# EAGLE board OneLedBlinker (EAGLE 7.6.0)
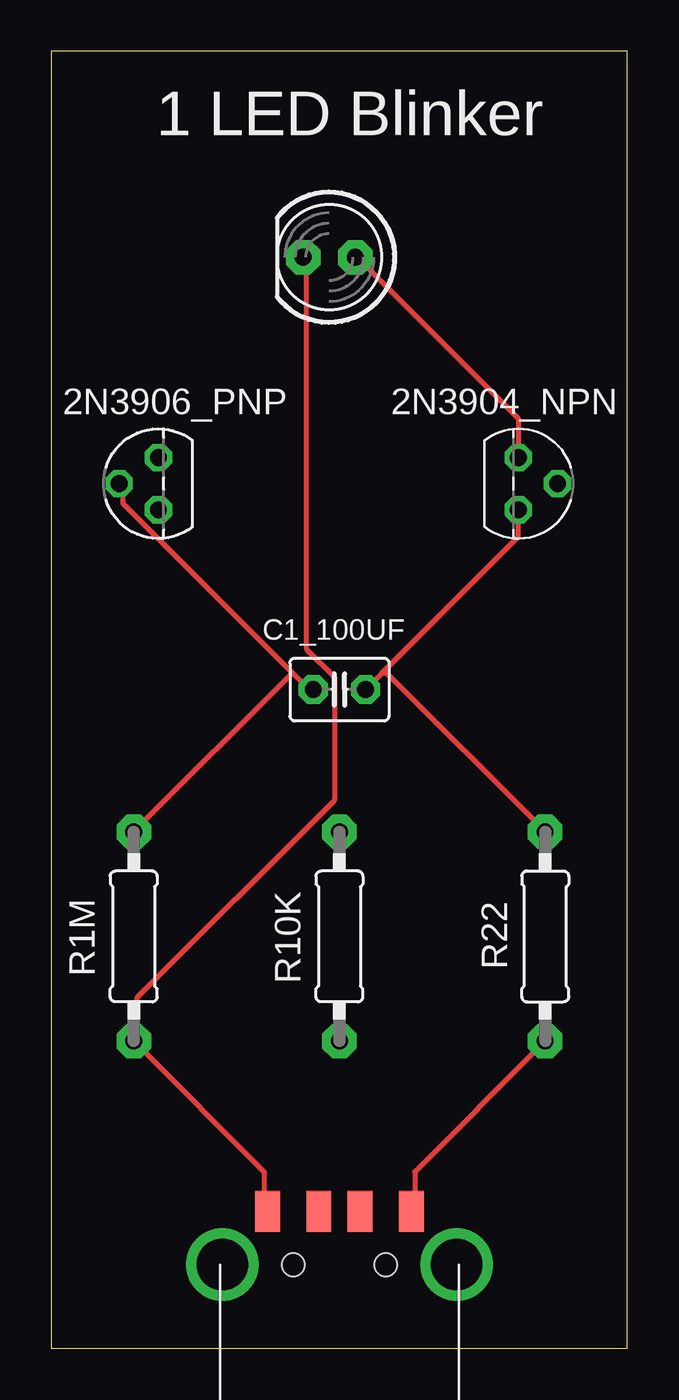
[diagram p0: board, top side]
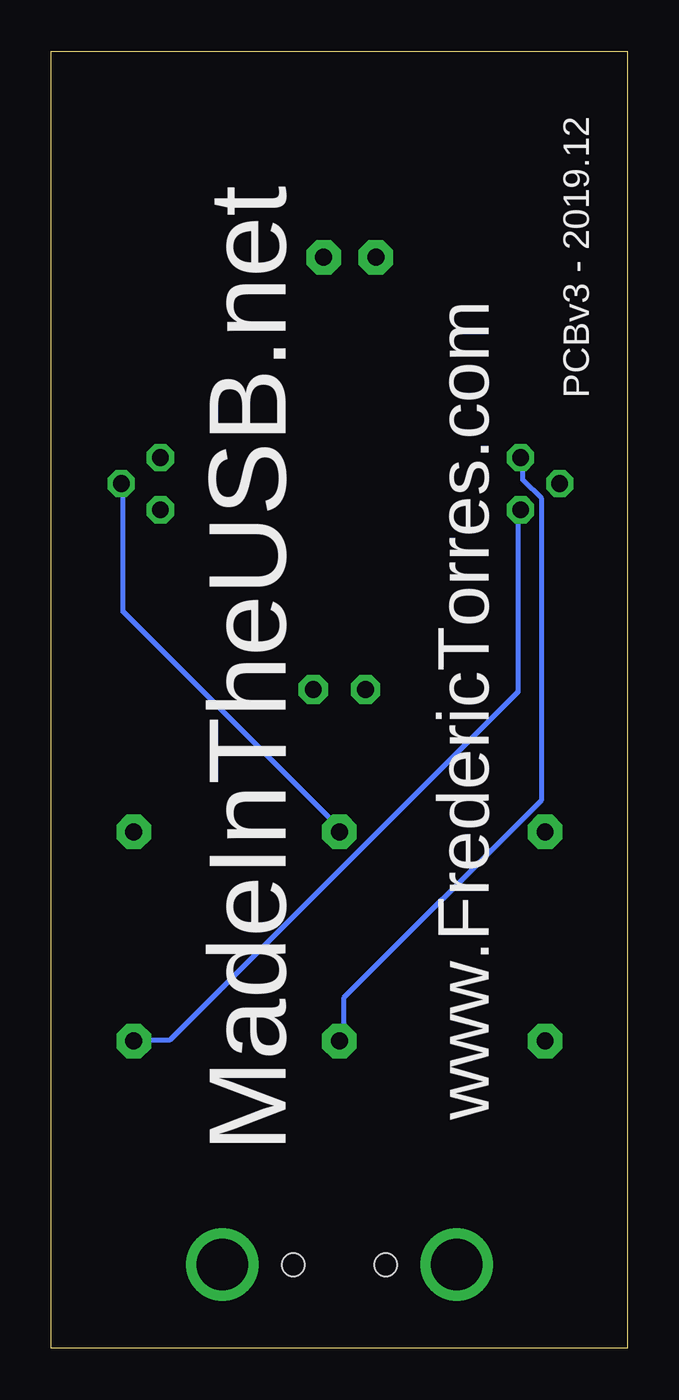
[diagram p1: board, bottom side, seen from below]

Size 28 x 63 mm. Coordinates in mm from the lower left corner, seen from the top.
Outline: 0,0 28,0 28,63 0,63 0,0
Copper layers (1*16): Top 0.035mm / dielectric 1.5mm / Bottom 0.035mm
Design rules "default": minimum track width 10mil, minimum drill 24mil, track to track 8mil, track to pad 8mil, pad to pad 8mil, via to via 8mil, smd to smd 8mil, copper to edge 40mil, drill to drill 8mil, minimum pad ring 10mil, minimum via ring 8mil, stop-mask expansion 4mil, vias tented up to drill 0mil, thermal gap 10mil

## Footprints (pad centres in the part's own frame; a part is rotated, then mirrored left to right if it is on the bottom)
TO92 = drill 0.813 octagon: 1 1.27,0; 2 0,1.905; 3 -1.27,0
C025-030X050 = drill 0.813 pad 1.422 octagon: 1 -1.27,0; 2 1.27,0
LED5MM = drill 0.813 pad 1.676 octagon: A -1.27,0; K 1.27,0
0207/10 = drill 0.813 pad 1.676 octagon: 1 -5.08,0; 2 5.08,0
MOLEX_480371000 = smd 1.2 x 2: 1 3.5,2.6; 2 1,2.6; 3 -1,2.6; 4 -3.5,2.6 | drill 2.5: M1 -5.7,0; M2 5.7,0 | hole 1.1: -2.25,0; 2.25,0

## Placement (x,y rotation side)
2N3904_NPN  2N3904  [TO92]  22.7,42 270 top
2N3906_PNP  2N3906  [TO92]  5.2,42 90 top
C1_100UF  [C025-030X050]  14,32 0 top
LED1  [LED5MM]  13.5,53 180 top
R1M  [0207/10]  4,20 90 top
R10K  [0207/10]  14,20 90 top
R22  [0207/10]  24,20 270 top
X1  USB-A  [MOLEX_480371000]  14,4.05 0 top

## Library data of the parts
2N3904_NPN = transistor
2N3906_PNP = transistor-pnp
C1_100UF LED1 R1M R10K R22 X1 = adafruit

## Nets
N$1: 2N3906_PNP.3 R22.2 X1.1
N$2: 2N3904_NPN.1 C1_100UF.2 R22.1
N$3: 2N3904_NPN.3 LED1.A
N$4: LED1.K R1M.1 X1.4
N$5: 2N3906_PNP.2 C1_100UF.1 R1M.2
N$6: 2N3906_PNP.1 R10K.1
N$7: 2N3904_NPN.2 R10K.2

## Tracks (layer width: path | path; a pad name or v marks a point on that pad's centre or on a via)
N$1
  Top 0.254: X1.1 17.66,6.75 17.66,8.57 23.83,14.75 R22.2
  Bottom 0.254: 2N3906_PNP.3 5.32,40.58 5.32,31.89 22.23,14.98 23.83,14.98 R22.2
N$2
  Top 0.254: 16.06,32.81 15.37,32.12 C1_100UF.2 | 16.06,32.81 22.69,39.44 22.69,40.58 2N3904_NPN.1 | 16.06,32.81 16.29,32.81 23.83,25.26 R22.1
N$3
  Top 0.254: 2N3904_NPN.3 22.69,43.32 22.69,45.15 14.92,52.92 LED1.A
N$4
  Top 0.254: X1.4 10.34,6.75 10.34,8.57 4.17,14.75 R1M.1 4.17,14.98 4.17,17.03 13.77,26.63 13.77,32.58 12.4,33.95 12.4,52.92 LED1.K
N$5
  Top 0.254: 11.72,32.81 12.63,31.89 C1_100UF.1 | 11.72,32.81 3.49,41.03 3.49,41.95 2N3906_PNP.2 | 11.72,32.81 4.17,25.26 R1M.2
N$6
  Bottom 0.254: 2N3906_PNP.1 5.09,43.09 5.09,42.18 4.17,41.26 4.17,26.63 13.77,17.03 13.77,14.98 R10K.1
N$7
  Bottom 0.254: 2N3904_NPN.2 24.52,41.95 24.52,35.78 14,25.26 R10K.2

## Text on the board
tNames: 1 LED Blinker
bNames: PCBv3 - 2019.12 | MadeInTheUSB.net | www.FredericTorres.com